# Altium PCB STM8S005C6_Footsprint.pcbdoc
Units mil, origin at the board's own origin, x right, y up, seen from the top; angles counter-clockwise.
Board outline 1095 x 1880 mil, 2 copper layers (Top Layer, Bottom Layer); 23 components, 26 nets, 112 pads, 2 vias.
Unrouted connection lines stored in the file: 1.
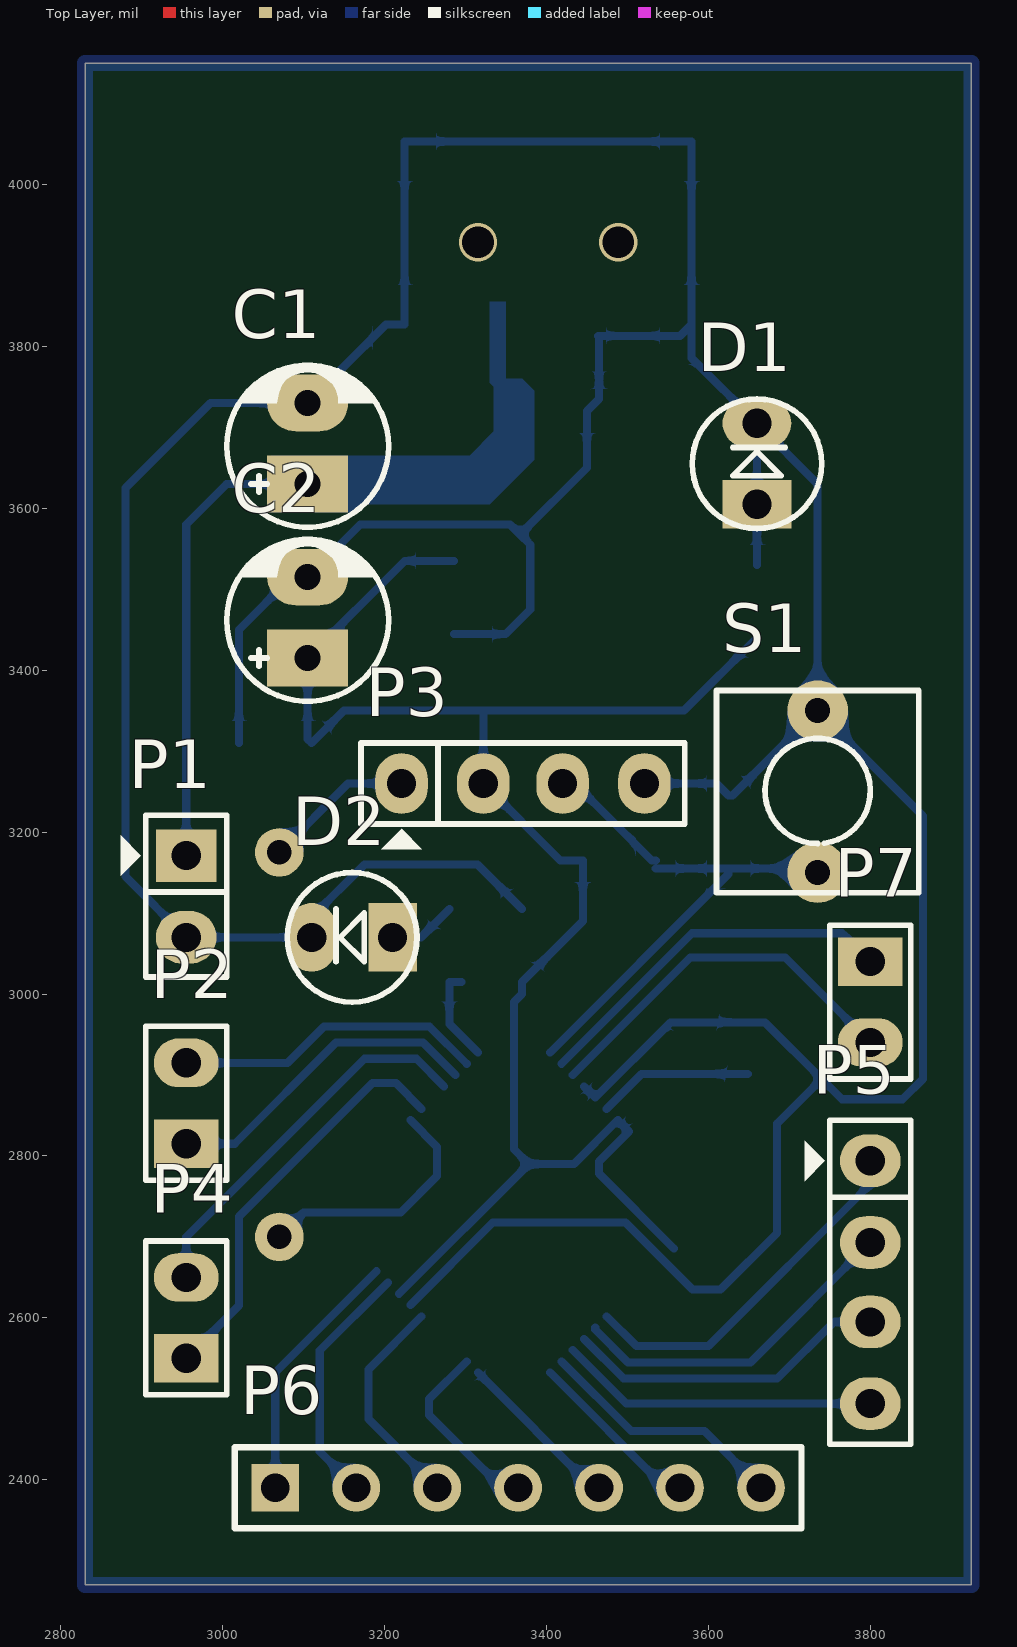
[diagram p0: Top Layer view]
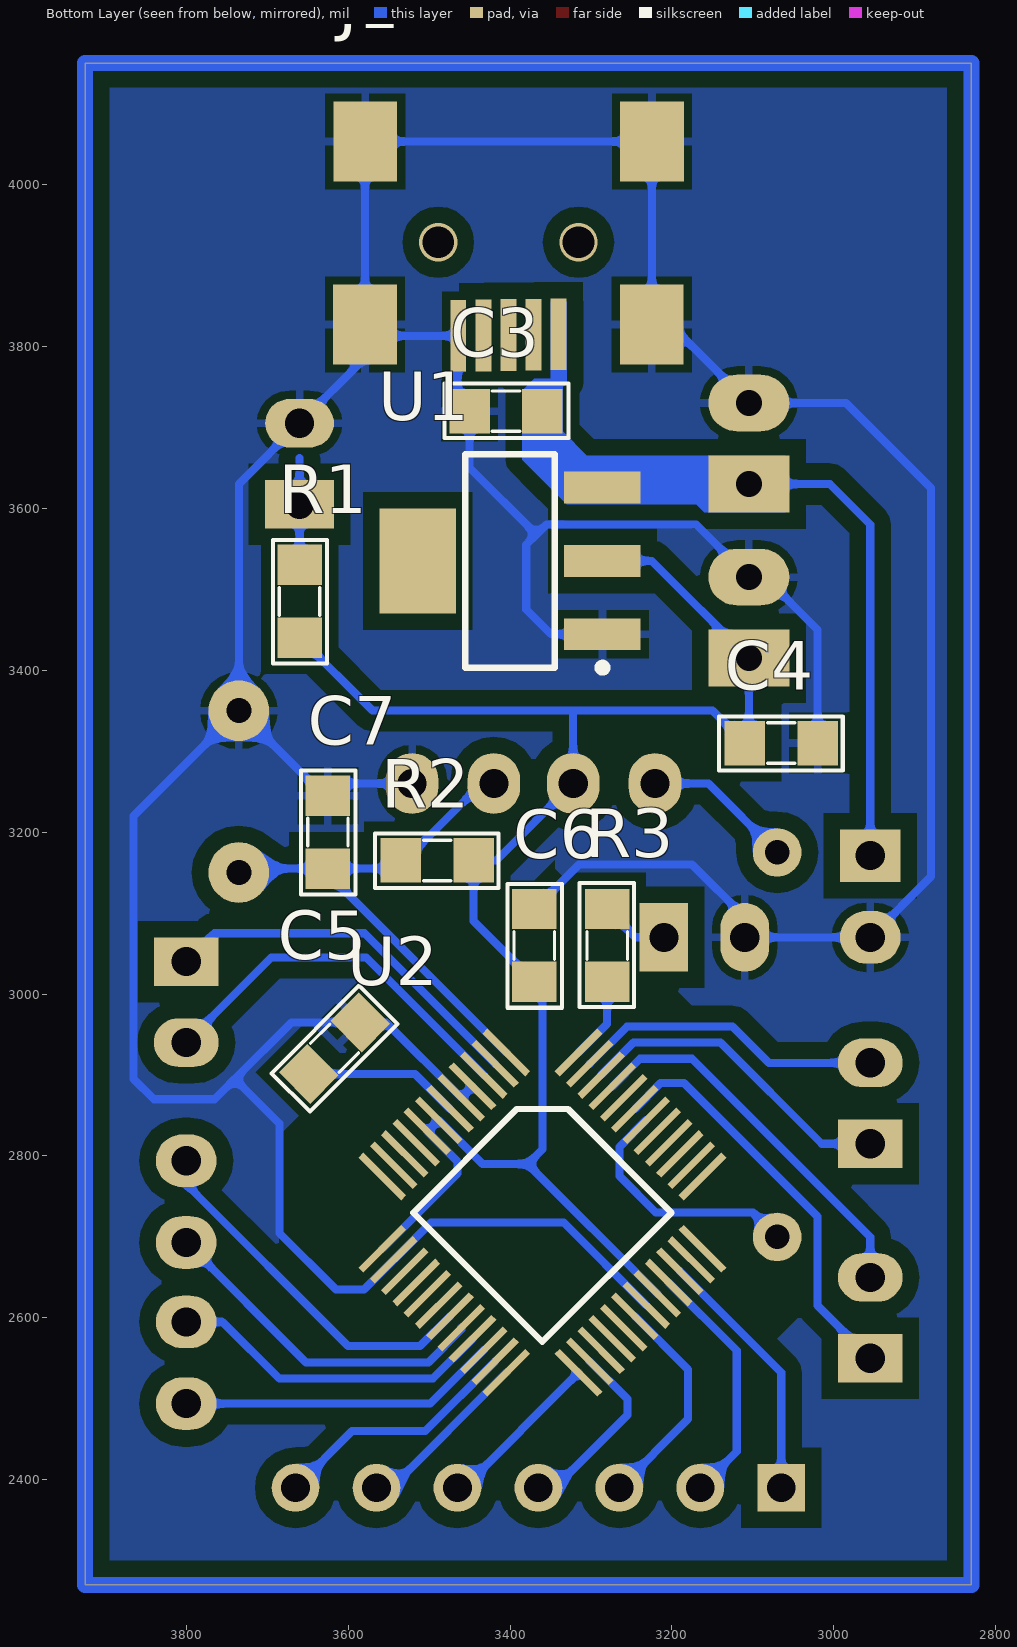
[diagram p1: Bottom Layer view, seen from below]
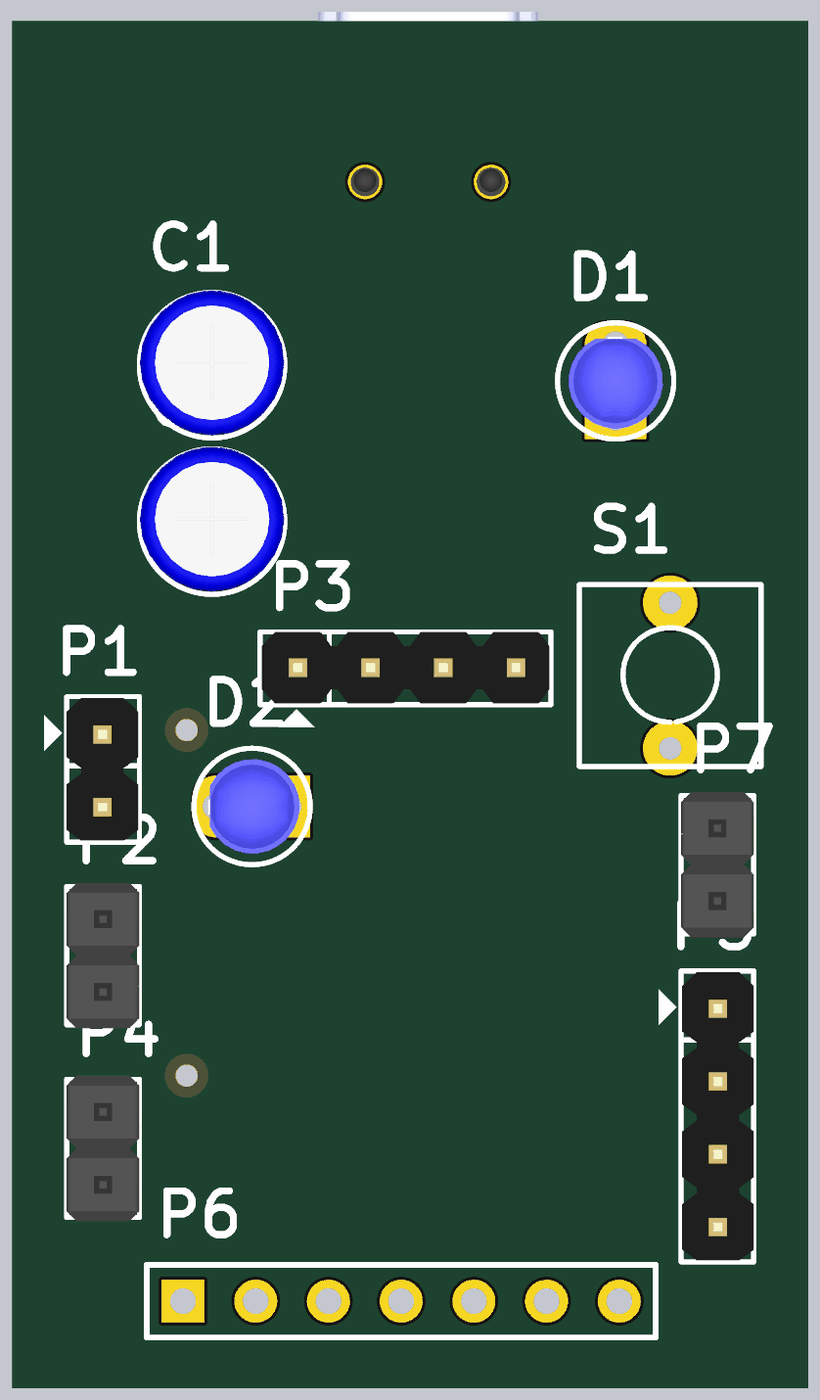
[diagram p2: 3D render of the assembled board from above, using the file's embedded part models]
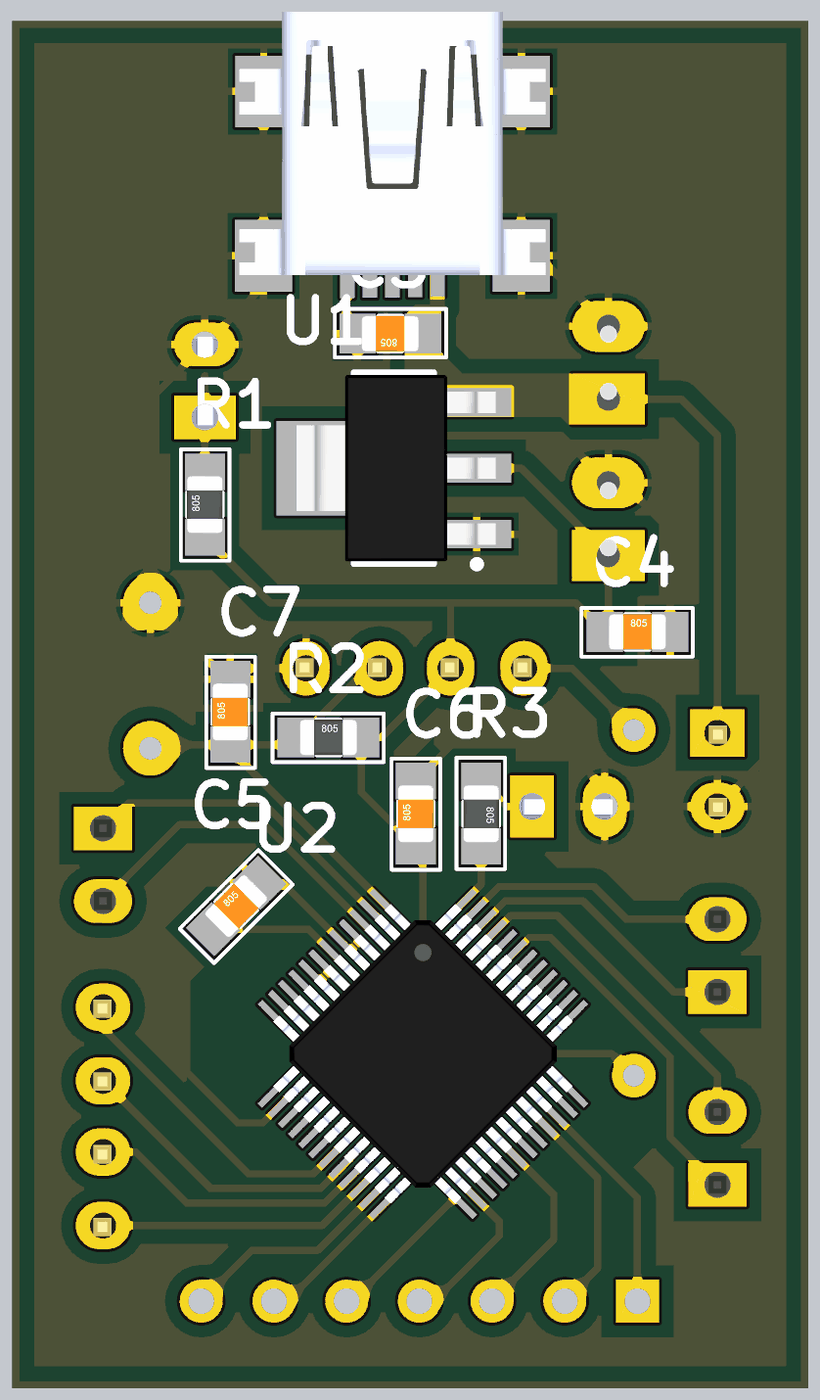
[diagram p3: 3D render of the assembled board from below, using the file's embedded part models]

## Layer stack, top to bottom
Top Solder: solder mask 0.4, Solder Resist, Dk 3.5
Top Layer: signal copper 1.4
Dielectric 1: dielectric 12.6, FR-4, Dk 4.8
Bottom Layer: signal copper 1.4
Bottom Solder: solder mask 0.4, Solder Resist, Dk 3.5

## Board outline
2830,2270 3925,2270 3925,4150 2830,4150

## Design rules (kind name [scope] priority, off if disabled: settings)
Clearance [All] p1: gap=20
PolygonConnect [All] p1: connectstyle=Relief reliefconductorwidth=10 reliefentries=4 polygonreliefangle="90 Angle" airgapwidth=10
RoutingLayers [All] p1: top layer_v5=FALSE bottom layer_v5=TRUE
RoutingVias [All] p1: holewidth=28 width=50 viastyle="Through Hole" minholewidth=28 minwidth=50 maxholewidth=28 maxwidth=50
SolderMaskExpansion [All] p1: expansion=4
Width [All] p1: maxlimit=10 minlimit=10 preferedwidth=10
29 further rules are at their usual default settings.

## Components (designator, comment, footprint, x,y, rotation, side; value= is the part's Value field where it differs from the comment)
C1 "Cap Pol" CP1/2 3105,3630 r90 top
C2 "Cap Pol" CP1/2 3105,3415 r90 top
C3 "Cap Non-Pol SMD" CAP-SM-0805 3360,3720 r0 bottom
C4 "Cap Non-Pol SMD" CAP-SM-0805 3110,3310 r180 bottom
C5 "Cap Non-Pol SMD" CAP-SM-0805 3648.64,2901.36 r135 bottom
C6 "Cap Non-Pol SMD" CAP-SM-0805 3370,3015 r90 bottom
C7 "Cap Non-Pol SMD" CAP-SM-0805 3625,3155 r90 bottom
D1 "LED" "LED 3mm" 3660,3605 r90 top
D2 "LED" "LED 3mm" 3210,3070 r180 top
J1 "USB-5" USB-M2 3405,3950 r180 bottom
P1 "Header 2" JP2 2955,3171 r270 top
P2 "UART" "HDR 2x1" 2955,2815 r90 top
P3 "Header 4" JP4 3321,3260 r0 top
P4 "IC" "HDR 2x1" 2955,2550 r90 top
P5 "Header 4" JP4 3800,2694 r270 top
P6 "SPI" HDR1X7 3065,2390 r0 top
P7 "XTAL" "HDR 2x1" 3800,3040 r270 top
R1 "RESISTOR SMD" RES-SM-0805 3660,3440 r90 bottom
R2 "RESISTOR SMD" RES-SM-0805 3535,3165 r180 bottom
R3 "RESISTOR SMD" RES-SM-0805 3280,3105 r270 bottom
S1 "Tact SW - 2Pin" SW2 3735,3350 r270 top
U1 "LM1117-3.3V" SOT223 3400,3535 r90 bottom
U2 "STM8S005C6" STM8S005C6 3360,2730 r225 bottom

## Footprints (in the part's own frame and the unit in brackets; to place one, negate y for a bottom-side part, rotate by r counter-clockwise, add the part's x,y. Pads: shape width x height; smd on the part's side, far side on the other; paste and mask are expansions set on the pad)
CAP-SM-0805 [mil]
  rect 50x55 smd: 1(0,0) 2(90,0)
  silkscreen extent -32,-34 121,33, body extent 6,-25 84,25, height 31
CP1/2 [mil] "Tu hoa < 22uF/16>50V"
  rect 70x100 hole 32: 1(0,0)
  oval 70x100 hole 32: 2(100,0)
  silkscreen extent -53,-100 146,100, body extent -49,-99 149,99, height 287
HDR1X7 [mm] "Connector; Header; 7 Position"
  rect 1.5x1.5 hole 0.9: 1(0,0)
  round 1.5 hole 0.9: 2(2.54,0) 3(5.08,0) 4(7.62,0) 5(10.16,0) 6(12.7,0) 7(15.24,0)
  silkscreen extent -1.27,-1.27 16.51,1.27, body extent -1.27,-1.27 16.51,1.27, height 7
"HDR 2x1" [mil]
  rect 60x80 hole 36: 1(0,0)
  oval 60x80 hole 36: 2(100,0)
  silkscreen extent -45,-50 145,50, body extent -50,-50 150,50, height 374
JP2 [mil]
  rect 65x75 hole 36: 1(0,0)
  oval 65x75 hole 36: 2(101,0)
  silkscreen extent -50,-81 150,50, body extent -48,-50 148,48, height 323
JP4 [mil] "Jumper 4"
  oval 65x75 hole 36: 1(-100,0) 2(1,0) 3(99,0) 4(200,0)
  silkscreen extent -150,-81 250,50, body extent -148,-48 248,50, height 323
"LED 3mm" [mil]
  rect 60x85 hole 36: 1(0,0)
  oval 60x85 hole 36: 2(100,0)
  silkscreen extent -30,-80 130,80, body extent -16,-65 111,65, height 182
RES-SM-0805 [mil]
  rect 50x55 smd: 1(0,0) 2(90,0)
  silkscreen extent -32,-34 121,33, body extent 6,-25 84,25, height 31
SOT223 [mm]
  rect 1x2.4 smd: 1(-2.3,-2.9) 2(0,-2.9) 3(2.3,-2.9)
  rect 3.3x2.4 smd: 4(0,2.9)
  silkscreen extent -3.47,-3.02 3.35,1.4, body extent -3.25,-3.56 3.25,3.4, height 1.68
STM8S005C6 [mm] "LQFP 48-pin"
  rect 1.9x0.22 smd: 1(-4.352,2.75) 2(-4.352,2.25) 3(-4.352,1.75) 4(-4.352,1.25) 5(-4.352,0.75) 6(-4.352,0.25) 7(-4.352,-0.25) 8(-4.352,-0.75) 9(-4.352,-1.25) 10(-4.352,-1.75) 11(-4.352,-2.25) 12(-4.352,-2.75) 25(4.352,-2.75) 26(4.352,-2.25) 27(4.352,-1.75) 28(4.352,-1.25) 29(4.352,-0.75) 30(4.352,-0.25) 31(4.352,0.25) 32(4.352,0.75) 33(4.352,1.25) 34(4.352,1.75) 35(4.352,2.25) 36(4.352,2.75)
  rect 0.22x1.9 smd: 13(-2.75,-4.352) 14(-2.25,-4.352) 15(-1.75,-4.352) 16(-1.25,-4.352) 17(-0.75,-4.352) 18(-0.25,-4.352) 19(0.25,-4.352) 20(0.75,-4.352) 21(1.25,-4.352) 22(1.75,-4.352) 23(2.25,-4.352) 24(2.75,-4.352) 37(2.75,4.352) 38(2.25,4.352) 39(1.75,4.352) 40(1.25,4.352) 41(0.75,4.352) 42(0.25,4.352) 43(-0.25,4.352) 44(-0.75,4.352) 45(-1.25,4.352) 46(-1.75,4.352) 47(-2.25,4.352) 48(-2.75,4.352)
  silkscreen extent -2.86,-2.86 2.86,2.86, body extent -4.5,-4.5 4.5,4.5, height 1.5
SW2 [mil] "SW button 2pin, 250x 250 mil"
  round 75 hole 31: 1(0,0) 2(200,0)
  silkscreen extent -25,-125 225,125
USB-M2 [mm]
  rect 0.5x2.25 smd: 1(1.651,-3.429) 2(0.864,-3.442) 3(0.076,-3.454) 4(-0.711,-3.467) 5(-1.499,-3.48)
  rect 2x2.5 smd: 5(-4.424,-3.124) 5(-4.42,2.616) 5(4.576,-3.124) 5(4.58,2.616)
  body extent -5.27,-3.8 5.43,5.4, height 3.95

## Part data
C1 C2: "Polarized Capacitor (Radial)"
C3 C4 C5 C6 C7: "Capacitor"
P1: "Header, 2-Pin"
P2 P4 P7: library part "Header 2"
P3 P5: "Header, 4-Pin"
P6: library part "Header 7", "Header, 7-Pin"
R1 R2 R3: "Resistor"
S1: "Switch button 2 pin"
U1: library part LM1117, "800mA Low-Dropout Linear Regulator"
U2: "Value line, 16 MHz STM8S 8-bit MCU, 32 Kbytes Flash, data  EEPROM, 10-bit ADC, timers, UART, SPI, I²C"

## Free pads (board coordinates)
  round 60 hole 30: 2(3070,3175) 3(3070,2700)

## Via types
v1: diameter 47.24, hole 39.37, Top Layer to Bottom Layer, 2 vias

## Nets (pads, with @x,y where several pads share a name; then routed paths per layer and width w, separated by ;. In a path a pad name is that pad's centre, name@x,y a point inside that pad or via, vN(x,y) a via of type N, cw(c..) or ccw(c..) an arc to the next point about the centre after c; other vN are vias at no path point)
+3V3: C2.1 C4.1 C6.1 P3.2 R1.1 R2.2 U1.2 U2.7 U2.8 U2.13 U2.32 | length 2189.7
  Bottom Layer w10: U2.32 3378.24,2790 ; U1.2 3225,3535 C2.1 3105,3315 C4.1 3150,3350 3320,3350 ; U2.13 3465,2778.11 3465,2793.24 U2.8 U2.7 3433.92,2790 3378.24,2790 ; R1.1 3570,3350 3320,3350 ; 3320,3350 3322,3348 P3.2 3417,3165 R2.2 3445,3090 C6.1 3370,3000 3360,2990 3360,2808.24 3378.24,2790
+5V: C1.1 C3.1 J1.1 P1.1 U1.3 | length 579.7
  Bottom Layer w10: P1.1 2955,3580 3005,3630 C1.1
ADC0: P5.4 U2.22 | length 394.9
  Bottom Layer w10: U2.22 3498.56,2494 P5.4
ADC1: P5.3 U2.21 | length 402.9
  Bottom Layer w10: U2.21 3495.4,2525 3685,2525 3755,2595 P5.3
ADC2: P5.2 U2.20 | length 420.2
  Bottom Layer w10: U2.20 3460.28,2585.58 3500.86,2545 3652,2545 P5.2
ADC3: P5.1 U2.19 | length 452.9
  Bottom Layer w10: U2.19 3511.08,2565 3600,2565 3800,2765 P5.1
GND: C1.2 C2.2 C3.2 C4.2 C5.2 C6.2 C7.2 D1.2 D2.2 J1.5 P1.2 P3.4 S1.1 U1.1 U2.4 U2.5 U2.14 U2.31 | length 6088.3
  Bottom Layer w10: C4.2 3020,3450 3085,3515 C2.2 3170,3580 3355,3580 3367.5,3567.5 ; U2.31 3333.7,2717.62 3497.66,2717.62 U2.14 3580.27,2635 3615,2635 3685,2705 3685,2840 3740,2895 ; U1.1 3349.45,3444.45 3380,3475 3380,3555 3367.5,3567.5 ; C6.2 3315,3160 3175,3160 3110,3095 D2.2 P1.2 2880,3145 2880,3625 2985,3730 C1.2 3202,3827 3224.83,3827 3224.83,4052.83 3224.67,4053 3579,4053 3579.17,4052.83 J1.5@3579.17,3827 ; U2.4 U2.5 3553.24,2965 C5.2 3670,2965 3740,2895 ; P3.4@3536,3245 P3.4 3610,3260 C7.2 3630,3245 S1.1 ; 3367.5,3567.5 3450,3650 C3.2 3465,3735 3465,3812 3464,3813 3565.17,3813 J1.5@3579.17,3827 ; J1.5@3579.17,3827 3579.17,3785.83 D1.2 3735,3630 S1.1 ; S1.1 3865,3220 3865,2895 3840,2870 3765,2870 3740,2895
IC1: P4.2 U2.45 | length 473.9
  Bottom Layer w10: P4.2 2955,2700 3175,2920 3239.6,2920 U2.45
IC2: P4.1 U2.43 | length 509.3
  Bottom Layer w10: P4.1 3020,2615 3020,2725 3185,2890 3213.92,2890 U2.43
NetD1_1: D1.1 R1.2 | length 132
  Bottom Layer w10: R1.2 D1.1 3660,3662
NetD2_1: D2.1 R3.1 | length 84.5
  Bottom Layer w10: D2.1 3245,3070 R3.1
NetP7_1: P7.1 U2.2 | length 478.2
  Bottom Layer w10: U2.2 3579.73,3075 3765,3075 P7.1 P7.1@3784.5,3040
NetP7_2: P7.2 U2.3 | length 471.2
  Bottom Layer w10: U2.3 3577.56,3045 3695,3045 P7.2
NRST: C7.1 P3.3 R2.1 S1.2 U2.1 | length 675
  Bottom Layer w10: U2.1 3625,3148.11 C7.1 ; P3.3 3435,3260 3530,3165 R2.1 ; R2.1@3535,3155 C7.1 ; S1.2 3730,3155 C7.1
PD7: R3.2 U2.48 | length 116.9
  Bottom Layer w10: R3.2@3295,3015 R3.2 3280,2963.11 U2.48
SPI_CS0: P6.5 U2.25 | length 208.5
  Bottom Layer w10: U2.25 3457.68,2390 P6.5
SPI_CS1: P6.6 U2.24 | length 219.3
  Bottom Layer w10: U2.24 3546.89,2390 P6.6
SPI_CS2: P6.7 U2.23 | length 311.2
  Bottom Layer w10: U2.23 3504.73,2460 3595,2460 P6.7
SPI_CS3: P6.4 U2.26 | length 232.7
  Bottom Layer w10: U2.26 3255,2499.73 3255,2480 3345,2390 P6.4
SPI_MISO: P6.1 U2.34 | length 319.4
  Bottom Layer w10: P6.1 3065,2532.44 U2.34
SPI_MOSI: P6.2 U2.33 | length 307.1
  Bottom Layer w10: P6.2 3120,2435 3120,2559.6 U2.33
SPI_SCK: P6.3 U2.30 | length 274.3
  Bottom Layer w10: U2.30 3180,2536.08 3180,2475 P6.3
SWIM: P3.1 pad.2 pad.3 U2.42 | length 495.2
  Bottom Layer w10: pad.3 3100,2730 3220,2730 3265,2775 3265,2811.08 U2.42 ; pad.2 3155,3260 P3.1
UART_RX: P2.2 U2.47 | length 384.3
  Bottom Layer w10: P2.2 3080,2915 3125,2960 3255.27,2960 U2.47
UART_TX: P2.1 U2.46 | length 401
  Bottom Layer w10: P2.1 3015,2815 3140,2940 3247.44,2940 U2.46
VCAP: C5.1 U2.6 | length 192.3
  Bottom Layer w10: U2.6 3517.44,2901.36 C5.1
pads on no net: J1.2 J1.3 J1.4 U1.4 U2.9 U2.10 U2.11 U2.12 U2.15 U2.16 U2.17 U2.18 U2.27 U2.28 U2.29 U2.35 U2.36 U2.37 U2.38 U2.39 U2.40 U2.41 U2.44
copper on no net: | length 5950
  Bottom Layer w20: 2830,2270 3925,2270 3925,4150 2830,4150 2830,2270
  other v1: 3315.39,3928.57 3488.61,3928.57

## Polygon pours and split planes (outlines as drawn)
GND on Bottom Layer "Bottom Layer-No Net" (solid, remove dead copper, pour order 2): 2830,4150 3925,4150 3925,2270 2835,2270

## Other copper
Bottom Layer:
  region net +5V: 3330,3855 3350,3855 3350,3760 3370,3760 3385,3745 3385,3695 3385,3660 3360,3635 3330,3605 3170,3605 3160,3595 3060,3595 3060,3665 3305,3665 3335,3695 3335,3750 3330,3755